# Altium PCB v3score.PcbDoc
Units mil, origin at the board's own origin, x right, y up, seen from the top; angles counter-clockwise.
Board outline 6000 x 4000 mil, 2 copper layers (Top Layer, Bottom Layer); 35 components, 91 nets, 197 pads, 0 vias.
Unrouted connection lines stored in the file: 106.
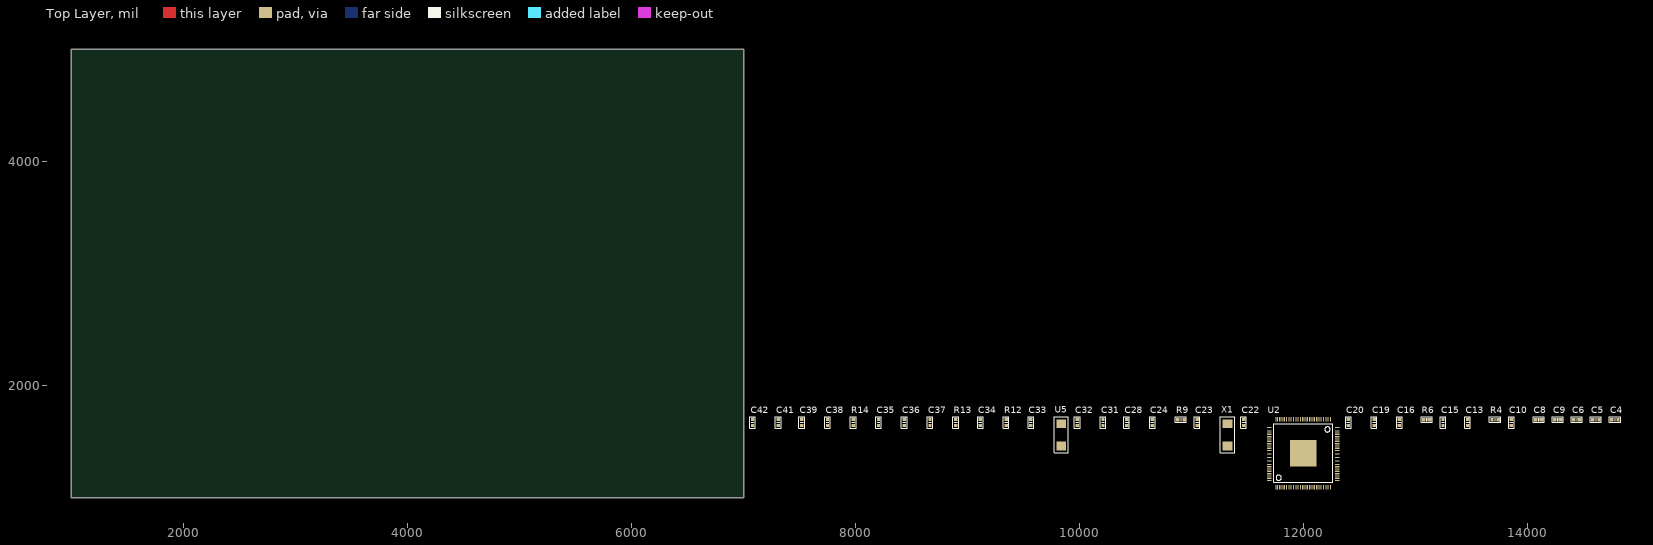
[diagram p0: Top Layer view]
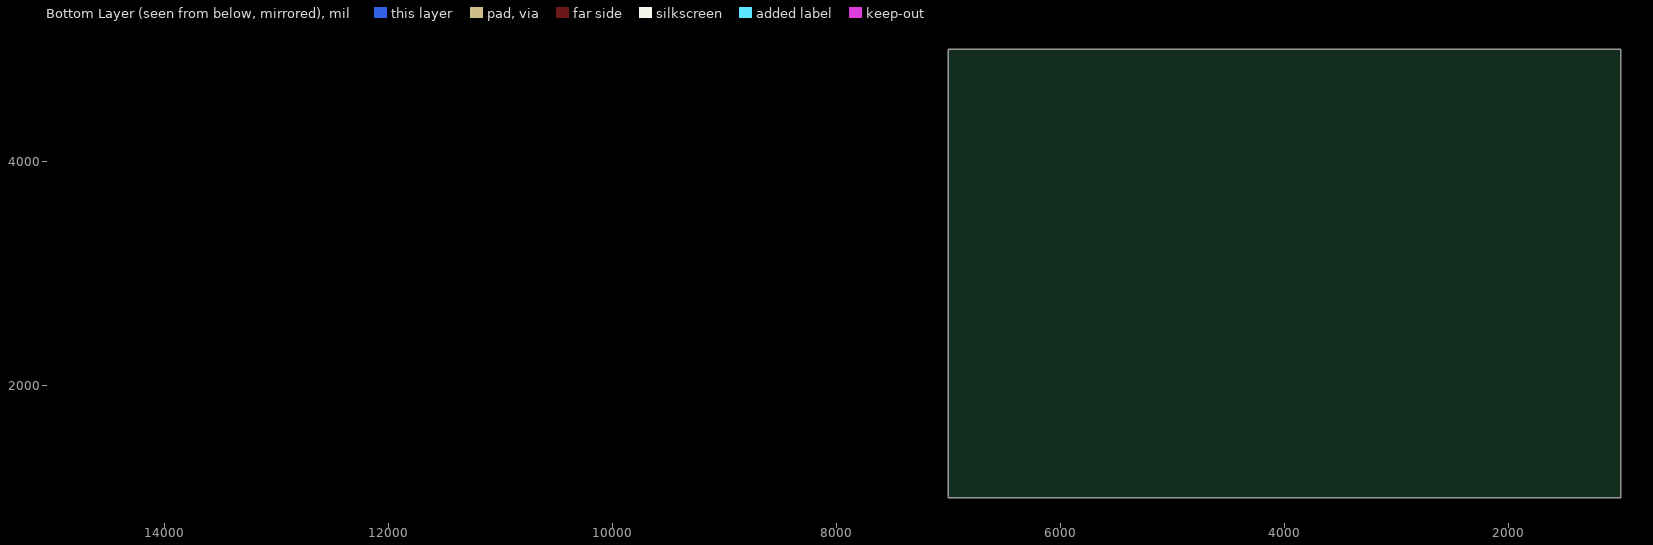
[diagram p1: Bottom Layer view, seen from below]

## Layer stack, top to bottom
Top Layer: signal copper 1.4
Dielectric: dielectric 12.6, FR-4, Dk 4.8
Bottom Layer: signal copper 1.4

## Board outline
1000,1000 7000,1000 7000,5000 1000,5000

## Design rules (kind name [scope] priority, off if disabled: settings)
Clearance [All] p1: gap=7
ComponentClearance [All] p1: gap=10 collisioncheckmode=3 verticalgap=10
PolygonConnect [All] p1: connectstyle=Relief reliefconductorwidth=10 reliefentries=4 polygonreliefangle="90 Angle"
RoutingVias [All] p1: holewidth=28 width=50 viastyle="Through Hole" minholewidth=28 minwidth=50 maxholewidth=28 maxwidth=50
SolderMaskExpansion [All] p1: expansion=4
TestPointUsage [All] p1: valid=0 allowmultiple=FALSE
Testpoint [All] p1: side=15 testpointundercomponent=TRUE minsize=40 maxsize=100 preferedsize=60 minholesize=0 maxholesize=40 preferedholesize=32 testpointgrid=1 style=1023 order=0-112345678
Width [All] p1: maxlimit=10 minlimit=10 preferedwidth=10
18 further rules are at their usual default settings.

## Components (designator, comment, footprint, x,y, rotation, side; value= is the part's Value field where it differs from the comment)
C4 "100nF" R0603-LJN 14755,1695 r0 top
C5 "100nF" R0603-LJN 14585,1695 r0 top
C6 "1uF" R0603-LJN 14415,1695 r0 top
C8 "10uF" R0603-LJN 14075,1695 r0 top
C9 "1uF" R0603-LJN 14245,1695 r0 top
C10 "10uF" R0603-LJN 13855,1645 r90 top
C13 "100nF" R0603-LJN 13465,1645 r90 top
C15 "10uF" R0603-LJN 13245,1645 r90 top
C16 "1uF" R0603-LJN 12855,1645 r90 top
C19 "1uF" R0603-LJN 12630,1645 r90 top
C20 "10uF/0402" R0603-LJN 12400,1645 r90 top
C22 "18pF  0402" R0603-LJN 11465,1645 r90 top
C23 "18pF  0402" R0603-LJN 11050,1645 r90 top
C24 "100nF/0402" R0603-LJN 10650,1645 r90 top
C28 "10uF/0402" R0603-LJN 10420,1645 r90 top
C31 "100nF/0402" R0603-LJN 10210,1645 r90 top
C32 "100nF/0402" R0603-LJN 9980,1645 r90 top
C33 "1uF/0402" R0603-LJN 9565,1645 r90 top
C34 "10uF/0402" R0603-LJN 9115,1645 r90 top
C35 "10uF/0402" R0603-LJN 8205,1645 r90 top
C36 "1uF/0402" R0603-LJN 8435,1645 r90 top
C37 "100nF/0402" R0603-LJN 8665,1645 r90 top
C38 "10uF/0402" R0603-LJN 7750,1645 r90 top
C39 "1uF/0402" R0603-LJN 7520,1645 r90 top
C41 "100nF/0402" R0603-LJN 7310,1645 r90 top
C42 "100nF/0402" R0603-LJN 7080,1645 r90 top
R4 "200K  1%" R0603-LJN 13685,1695 r0 top
R6 "0402 240  1%" R0603-LJN 13075,1695 r0 top
R9 "0402 6K  1%" R0603-LJN 10880,1695 r0 top
R12 "0402 240  1%" R0603-LJN 9345,1645 r90 top
R13 "0402 2K 1%" R0603-LJN 8895,1645 r90 top
R14 "0402 2K  1%" R0603-LJN 7980,1645 r90 top
U2 "V3S_1" eLQFP128-V3S-LJN 11995,1400 r0 top
U5 "CRYSTAL-24M" X5032-LJN 9840,1460 r90 top
X1 "32768" X5032-LJN 11325,1460 r90 top

## Footprints (in the part's own frame and the unit in brackets; to place one, negate y for a bottom-side part, rotate by r counter-clockwise, add the part's x,y. Pads: shape width x height; smd on the part's side, far side on the other; paste and mask are expansions set on the pad)
eLQFP128-V3S-LJN [mm]
  rect 0.18x1.032 smd: 1(-6.153,-7.791) 2(-5.753,-7.791) 3(-5.353,-7.791) 4(-4.953,-7.791) 5(-4.553,-7.791) 6(-4.153,-7.791) 7(-3.753,-7.791) 8(-3.353,-7.791) 9(-2.953,-7.791) 10(-2.553,-7.791) 11(-2.153,-7.791) 12(-1.753,-7.791) 13(-1.353,-7.791) 14(-0.953,-7.791) 15(-0.553,-7.791) 16(-0.153,-7.791) 17(0.247,-7.791) 18(0.647,-7.791) 19(1.047,-7.791) 20(1.447,-7.791) 21(1.847,-7.791) 22(2.247,-7.791) 23(2.647,-7.791) 24(3.047,-7.791) 25(3.447,-7.791) 26(3.847,-7.791) 27(4.247,-7.791) 28(4.647,-7.791) 29(5.047,-7.791) 30(5.447,-7.791) 31(5.847,-7.791) 32(6.247,-7.791) 65(6.247,7.609) 66(5.847,7.609) 67(5.447,7.609) 68(5.047,7.609) 69(4.647,7.609) 70(4.247,7.609) 71(3.847,7.609) 72(3.447,7.609) 73(3.047,7.609) 74(2.647,7.609) 75(2.247,7.609) 76(1.847,7.609) 77(1.447,7.609) 78(1.047,7.609) 79(0.647,7.609) 80(0.247,7.609) 81(-0.153,7.609) 82(-0.553,7.609) 83(-0.953,7.609) 84(-1.353,7.609) 85(-1.753,7.609) 86(-2.153,7.609) 87(-2.553,7.609) 88(-2.953,7.609) 89(-3.353,7.609) 90(-3.753,7.609) 91(-4.153,7.609) 92(-4.553,7.609) 93(-4.953,7.609) 94(-5.353,7.609) 95(-5.753,7.609) 96(-6.153,7.609)
  rect 1.032x0.18 smd: 33(7.747,-6.291) 34(7.747,-5.891) 35(7.747,-5.491) 36(7.747,-5.091) 37(7.747,-4.691) 38(7.747,-4.291) 39(7.747,-3.891) 40(7.747,-3.491) 41(7.747,-3.091) 42(7.747,-2.691) 43(7.747,-2.291) 44(7.747,-1.891) 45(7.747,-1.491) 46(7.747,-1.091) 47(7.747,-0.691) 48(7.747,-0.291) 49(7.747,0.109) 50(7.747,0.509) 51(7.747,0.909) 52(7.747,1.309) 53(7.747,1.709) 54(7.747,2.109) 55(7.747,2.509) 56(7.747,2.909) 57(7.747,3.309) 58(7.747,3.709) 59(7.747,4.109) 60(7.747,4.509) 61(7.747,4.909) 62(7.747,5.309) 63(7.747,5.709) 64(7.747,6.109) 97(-7.653,6.109) 98(-7.653,5.709) 99(-7.653,5.309) 100(-7.653,4.909) 101(-7.653,4.509) 102(-7.653,4.109) 103(-7.653,3.709) 104(-7.653,3.309) 105(-7.653,2.909) 106(-7.653,2.509) 107(-7.653,2.109) 108(-7.653,1.709) 109(-7.653,1.309) 110(-7.653,0.909) 111(-7.653,0.509) 112(-7.653,0.109) 113(-7.653,-0.291) 114(-7.653,-0.691) 115(-7.653,-1.091) 116(-7.653,-1.491) 117(-7.653,-1.891) 118(-7.653,-2.291) 119(-7.653,-2.691) 120(-7.653,-3.091) 121(-7.653,-3.491) 122(-7.653,-3.891) 123(-7.653,-4.291) 124(-7.653,-4.691) 125(-7.653,-5.091) 126(-7.653,-5.491) 127(-7.653,-5.891) 128(-7.653,-6.291)
  rect 6x6 smd: 129(0.022,-0.116)
  silkscreen extent -6.6,-6.74 6.7,6.56
R0603-LJN [mil]
  rect 30x30 smd: 1(52.5,-0.06) 2(-2,0)
  silkscreen extent -25,-25 75,25
X5032-LJN [mm] "5032晶振"
  rect 2x2.2 smd: 1(5.028,0.1) 2(0.028,0.1)
  silkscreen extent -1.57,-1.5 6.63,1.7

## Part data
C4 C5 C6 C8 C9 C10 C13 C15 C16 C19 C20 C24 C28 C31 C32 C33 C34 C35 C36 C37 C38 C39 C41 C42: library part CAPACITOR_0
C22 C23: library part CAPACITOR_Dup1
R4 R6 R9 R12 R13 R14: library part "R1 0805"
X1: library part CRYSTAL_XCOL-3

## Nets (pads, with @x,y where several pads share a name; then routed paths per layer and width w, separated by ;. In a path a pad name is that pad's centre, name@x,y a point inside that pad or via, vN(x,y) a via of type N, cw(c..) or ccw(c..) an arc to the next point about the centre after c; other vN are vias at no path point)
1V2: C6.2 C19.2 C28.2 C32.2 C33.2 C34.2 C39.2 C41.1 U2.19 U2.20 U2.21 U2.25 U2.26 U2.38 U2.47 U2.51 U2.56 U2.58 U2.64 U2.80 U2.88 U2.108 U2.126
1V8: C35.2 C36.2 C37.2 R13.2 U2.59 U2.60 U2.61 U2.62 U2.65 U2.66 U2.67 U2.68 U2.69 U2.70 U2.72 U2.79
3V: C5.2 C31.2 U2.76 U2.115
3V3: C4.2 C24.2 C42.2 R6.1 U2.12 U2.29 U2.50 U2.57 U2.85 U2.93 U2.98 U2.104 U2.109 U2.122 U2.127
D+: U2.111
D-: U2.110
EPHY-LINK-LED: U2.77
EPHY-RTX: R9.1 U2.94
EPHY-RXN: U2.89
EPHY-RXP: U2.90
EPHY-SPD-LED: U2.78
EPHY-TXN: U2.91
EPHY-TXP: U2.92
GND: C4.1 C5.1 C6.1 C8.1 C9.1 C10.1 C13.1 C15.1 C16.1 C19.1 C20.2 C22.2 C23.2 C24.1 C28.1 C31.1 C32.1 C33.1 C34.1 C35.1 C36.1 C37.1 C38.1 C39.1 C41.2 C42.1 R4.2 R9.2 R12.2 R14.2 U2.116 U2.129
HBIAS: U2.119
HPCOM: U2.125
HPCOMFB: U2.124
HPOUTL: U2.121
HPOUTR: U2.120
HPVCCBP: C8.2 C13.2 U2.123
KEYADC0: C15.2 U2.112
MCSI-CKN: U2.87
MCSI-CKP: U2.86
MCSI-D0N: U2.82
MCSI-D0P: U2.81
MCSI-D1N: U2.84
MCSI-D1P: U2.83
MICIN1N: U2.114
MICIN1P: U2.113
PB0/UART2_TX/PB_EINT0: U2.39
PB1/UART2_RX/PB_EINT1: U2.40
PB2/UART2_RTS/PB_EINT2: U2.41
PB3/UART2_CTS/PB_EINT3: U2.42
PB4/PWM0/PB_EINT4: U2.43
PB5/PWM1/PB_EINT5: U2.44
PB6/TWI0_SCK/PB_EINT6: U2.45
PB7/TWI0_SDA/PB_EINT7: U2.46
PB8/TWI1_SCK/UART0_TX/PB_EINT8: U2.48
PB9/TWI1_SDA/UART0_RX/PB_EINT9: U2.49
PC0/SPI_MISO: U2.52
PC1/SPI_CLK: U2.53
PC2/SPI_CS: U2.54
PC3/SPI_MOSI: U2.55
PE0/CSI_PCLK/LCD_CLK: U2.37
PE1/CSI_MCLK/LCD_DE: U2.36
PE2/CSI_HSYNC/LCD_HSYNC: U2.35
PE3/CSI_VSYNC/LCD_VSYNC: U2.34
PE4/CSI_D0/LCD_D2: U2.33
PE5/CSI_D1/LCD_D3: U2.32
PE6/CSI_D2/LCD_D4: U2.31
PE7/CSI_D3/LCD_D5: U2.30
PE8/CSI_D4/LCD_D6: U2.28
PE9/CSI_D5/LCD_D7: U2.27
PE10/CSI_D6/LCD_D10: U2.24
PE11/CSI_D7/LCD_D11: U2.23
PE12/CSI_D8/LCD_D12: U2.22
PE13/CSI_D9/LCD_D13: U2.18
PE14/CSI_D10/LCD_D14: U2.17
PE15/CSI_D11/LCD_D15: U2.16
PE16/CSI_D12/LCD_D18: U2.15
PE17/CSI_D13/LCD_D19: U2.14
PE18/CSI_D14/LCD_D20: U2.13
PE19/CSI_D15/LCD_D21: U2.11
PE20/CSI_FIELD/CSI_MIPI_MCLK: U2.10
PE21/CSI_SCK/TWI1_SCK/UART1_TX: U2.9
PE22/CSI_SDA/TWI1_SDA/UART1_RX: U2.8
PE23/LCD_D22: U2.7
PE24/LCD_D23: U2.6
PF0/SDC0_D1/JTAG_MS1: U2.107
PF1/SDC0_D0/JTAG_DI1: U2.106
PF2/SDC0_CLK/UART0_TX: U2.105
PF3/SDC0_CMD/JTAG_DO1: U2.103
PF4/SDC0_D3/UART0_RX: U2.102
PF5/SDC0_D2/JTAG_CK1: U2.101
"PF6/USB ID": U2.100
PG0/SDC1_CLK/PG_EINT0: U2.5
PG1/SDC1_CMD/PG_EINT1: U2.4
PG2/SDC1_D0/PG_EINT2: U2.3
PG3/SDC1_D1/PG_EINT3: U2.2
PG4/SDC1_D2/PG_EINT4: U2.1
PG5/SDC1_D3/PG_EINT5: U2.128
RESET: C16.2 R6.2 U2.99
RTC-VIO: C20.1 U2.97
SVREF: C38.2 R13.1 R14.1 U2.63 U2.71
SZQ: R12.1 U2.73
VAR1: C9.2 U2.117
VAR2: C10.2 R4.1 U2.118
X24MIN: U2.75 U5.2
X24MOUT: U2.74 U5.1
X32KIN: C22.1 U2.96 X1.1
X32KOUT: C23.1 U2.95 X1.2